# Altium PCB osc_evo.PcbDoc (part 3 of 5)
Units mm, origin at the board's own origin, x right, y up, seen from the top; angles counter-clockwise.
Board outline 145 x 85 mm, 4 copper layers (Top Layer, Mid-Layer 1, Mid-Layer 2, Bottom Layer); 114 components, 170 nets, 648 pads, 625 vias.
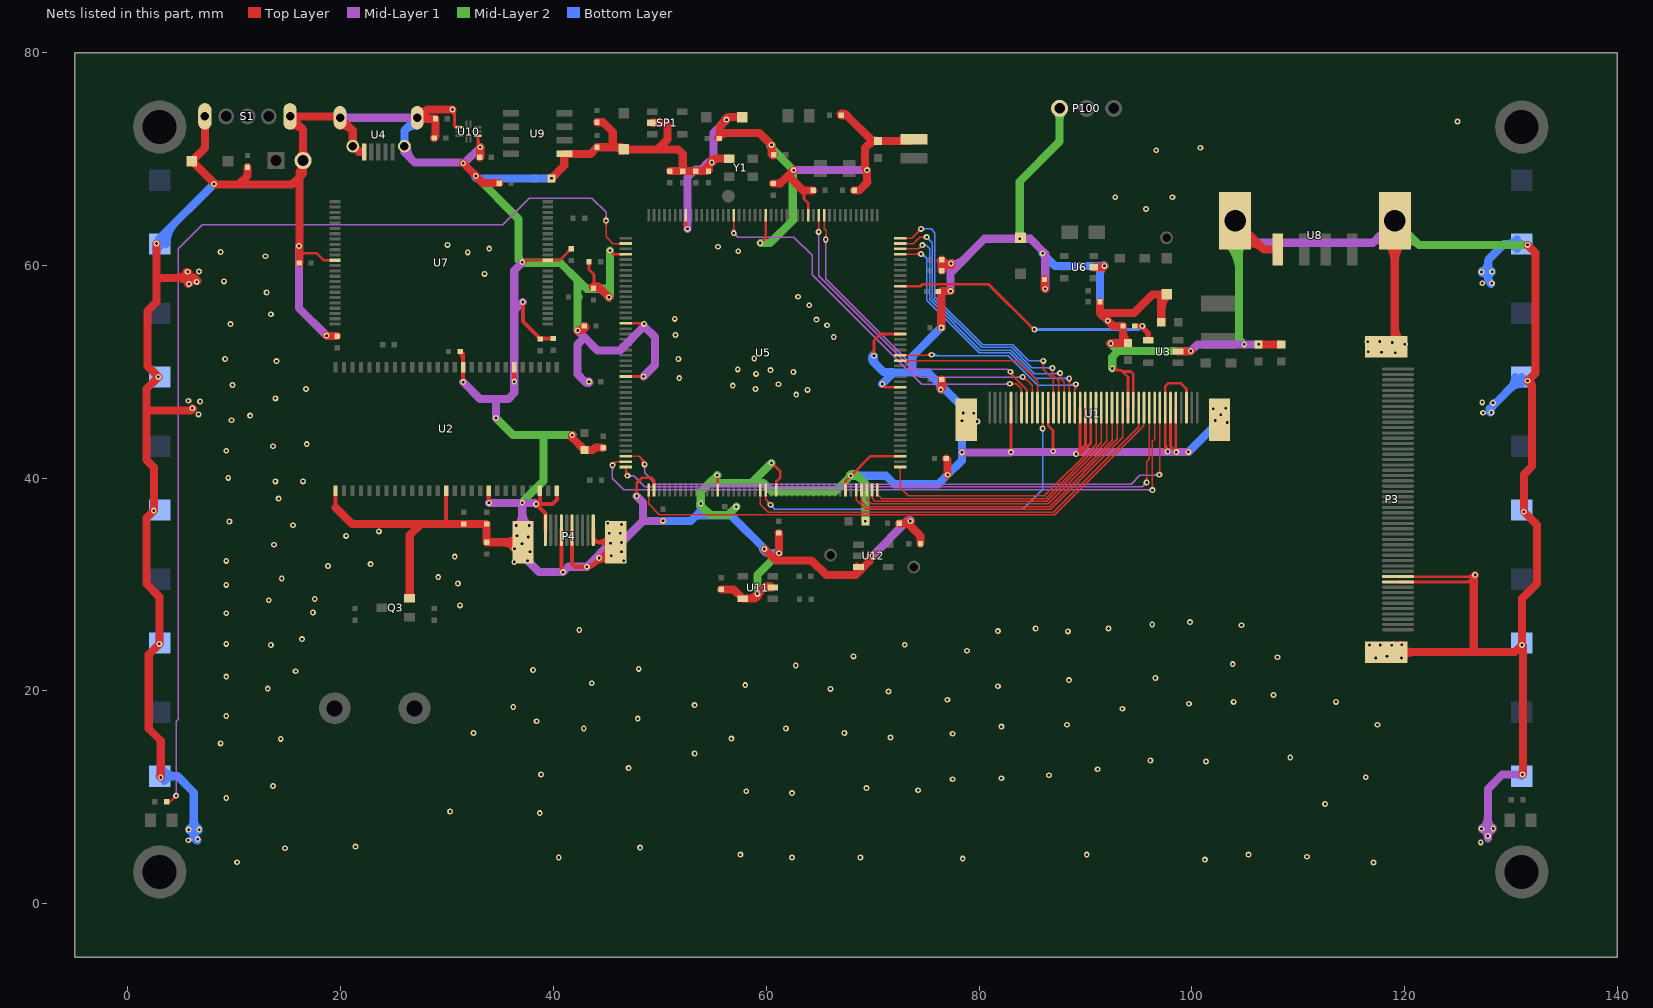
[diagram p5: the nets of this part, all layers, seen from the top]

## Via types
v1: diameter 0.55, hole 0.25, Top Layer to Bottom Layer, tented both sides, 463 vias
v2: diameter 0.55, hole 0.25, Top Layer to Bottom Layer, 156 vias
v3: diameter 0.45, hole 0.2, Top Layer to Bottom Layer, tented both sides, 4 vias
v4: diameter 1.5, hole 1.5, Top Layer to Bottom Layer, tented both sides, 2 vias

## Nets (pads, with @x,y where several pads share a name; then routed paths per layer and width w, separated by ;. In a path a pad name is that pad's centre, name@x,y a point inside that pad or via, vN(x,y) a via of type N, cw(c..) or ccw(c..) an arc to the next point about the centre after c; other vN are vias at no path point) (continued)
GND: BT1.2 C1.2 C2.2 C4.2 C5.2 C6.2 C7.2 C8.2 C9.2 C10.2 C11.2 C12.2 C14.2 C15.2 C16.2 C17.2 C18.2 C19.2 C20.2 C21.2 C22.2 C23.2 C24.2 C25.2 C26.2 C27.2 C28.2 C29.2 C30.2 C31.2 C32.2 C33.2 C34.2 C35.1 C36.1 C37.2 C38.2 C39.2 C40.2 C41.1 C42.1 C43.2 C44.2 C45.2 C46.1 C47.2 C48.2 C49.2 C50.2 C51.2 C52.2 C53.2 C54.2 K1.1 K2.1 K3.1 K4.1 K5.1 K6.1 K7.1 K8.1 K9.1 K10.1 P1.2 P3.0 P3.10 P3.11 P4.0 P4.1 P4.4 P4.6 P4.10 P100.1 Q3.2 R1.2 R2.1 R5.2 R7.2 R12.1 R13.1 R37.1 S1.1 S1.5 SP1.2 U1.0 U1.3 U1.5 U1.6 U1.7 U1.13 U1.14 U1.21 U1.22 U1.23 U1.29 U1.36 U2.6 U2.12 U2.28 U2.41 U2.46 U2.52 U2.54 U3.2 U4.0 U4.5 U5.14 U5.22 U5.37 U5.48 U5.61 U5.71 U5.90 U5.102 U5.113 U5.126 U5.135 U5.148 U5.158 U6.2 U7.13 U7.36 U8.0 U8.4 U9.1 U10.3 U10.8 U11.2 U11.5 U12.3 Y1.2 | length 1116
  Top Layer w0.254: 16.125,60.875 16.375,61.125 17.775,61.125 18.425,60.475 U7.36@19.475,60.475 ; v1@30.42,74.545 cw(c29.745,73.87) 30.7,73.87 ; v1(30.525,74.65) 30.7,74.475 30.7,73.1 30.775,73.025 U10.8@31.1,73.025 ; 30.7,73.393 ccw(c31.318,73.393) U10.8@30.881,72.956 ; 32.9,71.387 ccw(c33.412,71.387) v1@33.05,71.025 ; 32.9,72.001 ccw(c34.026,72.001) v1@33.23,71.205 ; U10.3@32.9,72.1 32.9,71.325 ; v1@32.978,71.113 ccw(c32.71,71.135) 32.9,71.325 ; v1@33.112,71.247 cw(c33.09,71.515) 32.9,71.325 ; v1(33.125,71.1) 32.9,71.325 ; v1(37.075,60.3) 37.25,60.475 U7.13@39.475,60.475 40.575,60.475 41.65,61.55 C45.2@41.675,61.55 ; v1@37.18,60.195 cw(c37.855,59.52) 37.855,60.475 ; 41.422,61.322 cw(c41.675,61.07) C45.2@41.675,61.427 ; C45.2@41.483,61.383 ccw(c41.315,61.55) C45.2@41.552,61.55 ; C30.2@43.263,60.238 cw(c43.053,60.028) 43.35,60.028 cw(c43.647,60.028) C30.2@43.437,60.238 ; C30.2@43.35,60.325 43.35,59.625 43.825,59.15 R12.1@43.825,57.9 ; R12.1@43.688,57.937 ccw(c43.357,58.268) 43.825,58.268 ; v1@45.327,61.255 cw(c45.327,60.971) 45.528,61.172 ; v1(45.327,61.403) 45.327,61.373 45.65,61.05 U5.48@46.8,61.05 ; v1@45.475,61.403 ccw(c45.905,61.403) 45.601,61.099 ; U5.71@46.8,49.55 v1(48.475,49.55) ; U5.61@46.8,54.55 48.475,54.55 v1(48.525,54.5) ; v1@47.72,38.43 ccw(c47.468,38.682) 47.825,38.682 ccw(c48.182,38.682) v1@47.93,38.43 ; v1(47.825,38.325) 47.825,39.525 48.35,40.05 49.2,40.05 49.45,39.8 U5.90@49.45,38.9 ; 48.047,54.55 cw(c48.047,54.022) v1@48.42,54.395 ; v1@48.37,49.445 ccw(c48.118,49.193) 48.118,49.55 ccw(c48.118,49.907) v1@48.37,49.655 ; U5.37@52.45,64.144 ccw(c53.319,64.144) v1@52.705,63.53 ; U5.37@52.45,64.7 52.45,63.625 v1@52.712,63.362 ; v1@55.295,40.17 cw(c54.922,39.797) 55.45,39.797 ; v1(55.4,40.275) 55.425,40.275 55.45,40.25 U5.102@55.45,38.9 ; v1(59.45,62.1) 59.475,62.1 59.95,62.575 U5.22@59.95,64.7 ; v1@59.45,62.248 ccw(c59.45,62.666) 59.745,62.37 ; v1@59.598,62.1 cw(c59.895,62.1) 59.685,62.31 ; v1@60.5,41.277 cw(c60.5,40.859) 60.795,41.155 ; v1(60.5,41.425) 60.525,41.425 61.325,40.625 61.325,40.075 60.95,39.7 U5.113@60.95,38.9 ; v1@60.648,41.425 ccw(c60.945,41.425) 60.735,41.215 ; 63.475,67.05 63.55,66.975 63.55,66.25 63.946,65.854 63.946,64.704 U5.14@63.95,64.7 ; U5.126@67.45,38.9 67.45,39.725 v1(67.95,40.225) 69.775,42.05 U5.135@72.6,42.05 ; v1@67.802,40.225 cw(c67.445,40.225) 67.697,39.972 cw(c67.95,39.72) v1@67.95,40.077 ; v1@67.95,40.373 ccw(c67.95,40.73) 68.203,40.478 ccw(c68.455,40.225) v1@68.098,40.225 ; v1@70.02,51.605 ccw(c69.768,51.857) 70.125,51.857 ccw(c70.482,51.857) v1@70.23,51.605 ; v1(70.125,51.5) 70.125,52.925 70.75,53.55 U5.158@72.6,53.55 ; v1@70.9,48.702 cw(c70.9,48.345) 71.153,48.597 cw(c71.405,48.85) v1@71.048,48.85 ; v1(70.9,48.85) 71.2,48.55 U5.148@72.6,48.55 ; v1@82.895,42.555 ccw(c82.643,42.807) 83,42.807 ccw(c83.357,42.807) v1@83.105,42.555 ; v1(83,42.45) U1.36@83,46.625 ; U1.29@86.5,46.625 86.5,44.95 86.95,44.5 86.95,42.55 v1(86.975,42.525) ; v1@86.87,42.63 ccw(c86.678,42.822) 86.95,42.822 ; 86.95,42.943 ccw(c87.393,42.943) v1@87.08,42.63 ; v1@89.125,42.169 ccw(c89.125,42.879) 89.627,42.377 ; v1@89.23,42.17 cw(c89.482,41.918) 89.482,42.275 cw(c89.482,42.632) v1@89.23,42.38 ; v1@89.273,42.275 cw(c89.63,42.275) 89.378,42.528 cw(c89.125,42.78) 89.125,42.423 ccw(c89.125,43.746) 90.06,42.81 ; U1.23@89.5,46.625 89.5,42.65 ; U1.22@90,46.625 90,43.15 89.5,42.65 ; U1.21@90.5,46.625 90.5,43.25 89.525,42.275 v1(89.125,42.275) 89.5,42.65 ; v1(92.525,50.3) 92.675,50.15 93.35,50.15 93.475,50.025 ; v1@92.63,50.405 ccw(c93.244,51.019) 93.244,50.15 ; U1.14@94,46.625 94,49.5 93.475,50.025 ; U1.13@94.5,46.625 94.5,49.775 94.25,50.025 93.475,50.025 ; 97.5,42.787 ccw(c98.012,42.787) v1@97.65,42.425 ; 97.5,43.4 ccw(c98.625,43.4) v1@97.83,42.605 ; v1@97.578,42.513 ccw(c97.311,42.535) 97.5,42.725 ccw(c97.69,42.914) v1@97.712,42.647 ; v1(97.725,42.5) 97.5,42.725 97.5,48.6 97.825,48.925 98.95,48.925 99.5,48.375 U1.3@99.5,46.625 ; U1.6@98,46.625 98,43 v1@98.492,42.508 ; v1@98.402,42.45 ccw(c98.045,42.45) 98.297,42.703 ccw(c98.55,42.955) v1@98.55,42.598 ; 98.492,42.947 ccw(c99.047,42.947) v1@98.655,42.555 ; U1.5@98.5,46.625 98.492,46.617 v1@98.492,42.508 ; v1(98.55,42.45) v1@98.492,42.508 ; P3.10@119.375,30.25 125.975,30.25 126.475,30.75 P3.11@119.375,30.75 ; 125.906,30.75 ccw(c125.906,31.619) v1@126.52,31.005 ; v1@126.477,30.9 cw(c126.12,30.9) 126.372,30.647 cw(c126.625,30.395) v1@126.625,30.752
  Top Layer w0.381: 19.525,37.25 U2.28@19.525,38.825 ; U2.41@29.925,38.825 29.925,35.75 29.975,35.7 ; C8.2@31.208,51.858 cw(c30.442,51.092) 31.525,51.092 ; C8.2@31.241,51.841 cw(c31.191,51.511) 31.525,51.511 ; C8.2@31.25,51.9 31.525,51.625 U2.12@31.525,50.425 31.525,48.975 31.5,48.95 31.5,49 v1(31.525,49.025) ; U2.46@33.925,38.825 33.925,37.7 v1(33.95,37.675) ; v1(36.325,49.075) U2.6@36.325,50.425 ; v1(37.125,56.55) 37.125,54.725 C4.2@38.775,53.075 38.825,53.125 C6.2@39.975,53.125 ; U2.52@38.725,38.825 38.725,37.925 v1(38.375,37.575) ; C4.2@38.817,53.033 cw(c39.039,52.811) 39.039,53.125 ; P4.1@39.25,35.11 39.25,36.7 v1(38.375,37.575) ; U2.54@40.325,38.825 40.325,37.975 39.925,37.575 v1(38.375,37.575) ; v1@40.75,31.375 P4.4@40.75,35.11 ; 40.75,31.741 ccw(c41.466,31.741) v1@40.96,31.235 ; P4.6@41.75,35.11 41.75,31.975 42.05,31.675 43.535,31.675 ; v1@43.15,31.759 ccw(c43.15,32.893) 43.952,32.091 ; 43.567,31.693 ccw(c42.891,32.895) v1@44.219,32.523 ; P4.10@43.75,35.11 43.75,34.35 44.11,33.99 ; 43.991,32.131 cw(c45.24,30.883) P4.0@45.731,32.578 ; 44.012,32.148 ccw(c43.677,32.575) v1@44.216,32.51 ; 44.113,32.253 ccw(c43.867,32.5) v1@44.216,32.5 ; v1@44.3,32.584 ccw(c44.3,32.933) 44.547,32.687 ; v1@44.351,32.567 ccw(c44.705,33.03) 44.782,32.452 ; v1@44.447,32.587 cw(c45.444,31.59) P4.0@45.837,32.944 ; P4.0@44.954,33.99 cw(c44.954,33.479) P4.0@45.315,33.84 ; P4.0@44.959,33.098 ccw(c44.157,33.9) P4.0@45.291,33.9 ; P4.0@45.128,32.537 ccw(c45.007,32.938) P4.0@45.376,32.74 ; P4.0@45.231,33.469 ccw(c44.11,32.525) 44.11,33.99 ; P4.0@45.231,34.511 cw(c44.11,35.455) 44.11,33.99 ; P4.0@45.375,33.99 44.11,33.99 ; P4.0@45.52,32.747 ccw(c45.87,32.977) P4.0@45.786,32.567 ; P4.0@45.568,33.707 43.535,31.675 ; P4.0@45.625,32.212 ccw(c45.035,30.175) 43.535,31.675 ; v1@44.361,32.558 ccw(c45.147,33.312) 45.124,32.223 cw(c45.147,33.312) v1@44.361,32.558
  Top Layer w0.762: v1(2.7,62.05) 2.7,58.825 ; v1(3.1,11.875) 3.1,15.325 1.975,16.45 1.975,23.425 v1(2.975,24.425) 2.975,28.85 1.75,30.075 1.75,36.25 v1(2.45,36.95) 2.45,41 1.75,41.7 1.75,46.375 ; 4.493,58.825 ccw(c4.493,60.532) v1@5.7,59.325 ; 4.618,58.825 cw(c4.618,57.118) v1@5.825,58.325 ; v1@5.527,59.36 ccw(c6.325,59.688) 6.325,58.825 ; v1@5.646,58.271 cw(c6.325,58.132) 6.325,58.825 ; 5.826,58.825 cw(c5.826,57.801) v1@6.55,58.525 ; 5.848,46.375 ccw(c5.848,46.802) v1@6.15,46.5 ; v1(6.075,46.575) 5.875,46.375 1.75,46.375 ; S1.1@7.25,74 7.25,71.025 C38.2@6.025,69.8 v1@8.137,67.687 ; v1@8.225,67.6 10.425,67.6 ; C39.2@11.25,69.225 11.25,68.425 10.425,67.6 ; S1.5@15.297,73.135 cw(c15.547,71.847) 16.475,72.775 ; C44.2@16.125,60.225 16.125,60.875 16.125,68.275 ; P1.2@16.158,69.577 cw(c15.669,69.156) 16.125,68.7 ; P1.2@16.179,69.554 cw(c15.463,68.838) 16.475,68.838 cw(c17.487,68.838) P1.2@16.771,69.554 ; P1.2@16.179,70.146 ccw(c15.463,70.862) 16.475,70.862 ccw(c17.487,70.862) P1.2@16.771,70.146 ; v1(18.675,53.4) 18.725,53.35 C7.2@19.675,53.35 ; 19.12,74 cw(c19.12,73.045) U4.0@19.795,73.72 ; 19.525,37.25 21.075,35.7 27.55,35.7 ; U4.0@19.954,73.156 cw(c19.988,71.513) 21.15,72.675 ; U4.0@21.366,71.232 ccw(c22.025,71.343) 22.025,70.675 21.67,70.675 U4.0@21.15,71.195 21.15,72.675 ; Q3.2@26.475,28.725 26.5,28.75 26.5,34.65 27.55,35.7 ; U4.0@27.319,74.559 ccw(c27.691,75.134) 28.175,74.65 ; U4.0@27.355,74.03 ccw(c27.97,74.645) 27.97,73.775 ; R13.1@28.8,71.975 28.925,72.1 C51.2@28.925,73.775 27.3,73.775 28.175,74.65 ; v1(30.525,74.65) 28.175,74.65 ; v1(31.525,69.6) 33.4,67.725 C47.2@34.925,67.725 ; C50.2@33.075,70.15 33.125,70.2 v1(33.125,71.1) ; 35.157,33.975 cw(c35.157,32.182) P4.0@36.425,33.45 ; 35.382,33.975 ccw(c35.382,35.768) P4.0@36.65,34.5 ; 35.619,33.975 ccw(c35.619,35.521) P4.0@36.712,34.428 ; 35.692,33.975 cw(c35.692,32.532) P4.0@36.712,33.552 ; 35.933,33.888 cw(c35.625,33.035) P4.0@36.446,33.42 ; P4.0@36.254,33.421 cw(c37.135,32.998) P4.0@37.135,33.975 ; P4.0@36.47,34.562 ccw(c37.135,34.645) P4.0@37.135,33.975 ; P4.0@36.484,34.296 ccw(c36.277,34.655) P4.0@36.677,34.548 ; P4.0@37.15,33.99 P4.0@37.135,33.975 ; v1(39.825,68.175) 41.025,69.375 U9.1@41.025,70.475 43.475,70.475 C48.2@44.1,71.1 45.575,71.1 ; v1(41.775,44.05) 41.775,43.8 C32.2@42.925,42.65 43.7,42.65 43.95,42.9 44.603,42.9 C40.2@44.653,42.85 ; C29.2@42.9,54.3 v1@42.475,53.875 ; C29.2@43.001,54.216 cw(c42.275,54.817) v1(42.275,53.875) v1@42.475,53.875 ; C29.2@43.023,54.254 cw(c42.475,54.46) v1@42.475,53.875 ; R12.1@43.701,57.958 cw(c43.978,57.553) 44.325,57.9 ; R12.1@43.775,57.981 cw(c43.775,56.849) 44.576,57.649 ; R12.1@43.825,57.9 44.325,57.9 ; C41.1@44.1,73.448 44.677,73.448 45.575,72.55 45.575,71.1 ; v1(45.225,57) 44.325,57.9 ; 45.826,71.1 cw(c45.826,70.124) C37.2@46.516,70.814 ; SP1.2@49.3,73.386 49.314,73.4 50.525,73.4 50.725,73.2 50.725,71.825 49.798,70.898 ; C15.2@50.95,68.85 C26.2@52.158,68.85 ; C11.2@54.444,68.85 cw(c55.335,68.85) v1@54.705,69.48 ; C11.2@54.618,68.974 ccw(c54.445,68.48) 54.075,68.85 ; v1@54.788,69.698 cw(c55.25,69.535) 55.25,70.025 ; v1@54.813,69.737 cw(c55.507,69.043) 55.507,70.025 ; C25.2@55.482,72.018 cw(c56.526,70.974) 56.526,72.45 ; C52.2@55.775,29.55 56.925,29.55 U11.5@57.8,28.675 58.725,28.675 ; v1@56.2,73.775 cw(c56.562,73.413) 56.562,73.925 ; Y1.2@56.525,70.025 55.25,70.025 ; C12.2@57.75,73.925 56.5,73.925 v1(56.275,73.7) 55.65,73.075 55.65,72.45 59.375,72.45 v1(60.5,71.325) 60.5,70.625 C42.1@60.725,70.4 ; 58.345,28.675 ccw(c58.345,29.955) v1@59.25,29.05 ; v1@59.277,29.097 cw(c58.725,29.247) 58.725,28.675 ; 59.471,29.421 cw(c60.4,28.493) U11.2@60.4,29.806 ; v1(59.825,33.35) 59.85,33.35 60.925,32.275 64.275,32.275 65.65,30.9 68.393,30.9 ; U11.2@60.445,29.793 ccw(c60.151,29.349) 59.775,29.725 ; C42.1@60.5,70.627 ccw(c60.952,70.627) C42.1@60.632,70.307 ; U11.2@60.6,29.725 59.775,29.725 ; C17.2@60.65,67.7 61.325,67.7 62.075,68.45 ; C16.2@61.175,34.85 61.2,34.825 v1(61.2,32.95) ; v1(62.575,68.95) 62.075,68.45 ; C36.1@64.425,67.05 63.475,67.05 62.075,68.45 ; R7.2@67.003,74.222 cw(c67.195,73.72) 67.575,74.1 ; R7.2@67.05,74.1 67.575,74.1 ; R7.2@67.05,74.231 cw(c67.05,73.28) 67.723,73.952 ; C35.1@68.275,67.05 68.75,67.05 69.525,67.825 69.475,67.875 v1(69.475,68.95) 69.3,69.125 69.3,71.025 69.975,71.7 ; U12.3@68.55,31.681 cw(c67.886,31.408) 68.393,30.9 ; U12.3@68.875,31.569 ccw(c68.875,32.021) 69.195,31.702 ; 69.604,71.329 cw(c70.5,70.433) C49.2@70.5,71.7 ; 69.604,72.071 ccw(c70.5,72.967) C49.2@70.5,71.7 ; 69.683,32.251 cw(c70.424,32.251) v1@69.9,32.775 ; 69.683,32.287 cw(c70.34,32.287) v1@69.905,32.779 ; v1(69.975,32.7) 69.683,32.408 69.683,32.19 68.393,30.9 ; 72.468,71.7 ccw(c72.468,72.53) BT1.2@73.055,71.943 ; C14.2@72.5,35.75 73.325,35.75 74.5,34.575 C54.2@74.5,33.85 ; 73.263,35.75 ccw(c73.263,36.262) v1@73.625,35.9 ; v1@73.444,35.975 ccw(c74.274,35.975) 73.687,35.388 ; BT1.2@73.889,71.859 73.73,71.7 C49.2@70.5,71.7 ; C22.2@76.382,60.468 ccw(c76.85,60.695) 76.85,60.175 ; v1(76.4,48.325) 76.5,48.425 C27.2@76.5,49.275 ; C22.2@76.407,60.432 ccw(c77.029,61.054) 77.029,60.175 ; v1(76.45,54.15) 76.45,57.575 v1(77.325,57.575) ; C18.2@76.5,59.5 C22.2@76.5,60.525 76.85,60.175 ; C22.2@76.66,60.365 ccw(c77.375,61.081) v1@77.375,60.069 ; C23.2@76.925,41.85 77.05,41.725 v1(77.05,40.325) ; v1(77.375,60.175) 76.85,60.175 ; v1@77.422,60.08 cw(c77.202,60.527) 76.85,60.175 ; C53.2@86.15,58.675 86.15,57.875 v1(86.225,57.8) ; U6.2@90.8,59.825 91.675,59.825 v1(91.8,59.95) ; R37.1@91.375,56.575 91.375,55.525 ; v1(92.375,52.65) 92.425,52.7 C34.2@94,52.7 ; 93.525,53.847 ccw(c95.147,53.847) C34.2@94,52.7 ; R1.2@97.125,54.65 97.125,56.75 C9.2@97.65,57.275 96.3,57.275 94.55,55.525 91.375,55.525 ; 97.125,55.72 cw(c99.205,55.72) C9.2@97.734,57.191 ; 97.125,56.533 cw(c97.756,56.533) C9.2@97.667,57.157 ; U3.2@98.7,51.9 99.85,51.9 v1(99.9,51.95) ; U8.0@104.075,64.2 106.775,61.5 ; U8.0@104.209,62.669 cw(c104.817,61.169) 105.962,62.313 ; U8.0@104.495,61.963 cw(c105.286,60.011) 106.775,61.5 ; v1(106.275,52.575) C1.2@108.4,52.575 ; U8.4@108.075,61.5 106.775,61.5 ; P3.0@118.255,52.35 119.075,53.17 U8.0@119.075,64.2 ; P3.0@118.275,23.35 cw(c118.999,22.626) P3.0@118.999,23.65 ; U8.0@118.284,62.209 cw(c116.373,60.298) 119.075,60.298 cw(c121.777,60.298) U8.0@119.866,62.209 ; P3.0@118.628,23.65 cw(c118.628,22.028) P3.0@119.775,23.175 ; P3.0@118.725,24.225 ccw(c120.113,25.613) P3.0@120.113,23.65 ; P3.0@118.817,52.788 ccw(c118.195,53.41) 119.075,53.41 ; P3.0@118.906,24.3 cw(c118.255,24.301) P3.0@118.255,23.65 126.5,23.65 ; 119.075,54.279 ccw(c121.184,54.279) P3.0@119.693,52.788 ; P3.0@119.623,24.323 ccw(c120.178,24.471) P3.0@119.89,23.974 ; P3.0@119.625,23.175 cw(c120.772,22.028) 120.772,23.65 ; P3.0@119.693,23.212 cw(c120.749,22.156) 120.749,23.65 cw(c120.749,25.144) P3.0@119.693,24.088 ; v1(126.625,30.9) 126.5,30.775 126.5,23.65 ; v1(131.075,12.15) 131.133,12.208 131.133,24.217 v1(131.025,24.325) ; v1(131.55,61.925) 132.3,61.175 132.3,49.9 v1(131.55,49.15) 131.975,48.725 131.975,41.125 131.2,40.35 v1(131.2,36.85) 132.45,35.6 132.45,30.1 131.025,28.675 v1(131.025,24.325) ; v1@131.609,49.238 cw(c131.143,48.549) 131.975,48.549 ; v1@131.625,49.225 cw(c130.78,48.38) 131.975,48.38 ; 1.75,46.375 1.75,48.4 v1(2.875,49.525) 1.85,50.55 1.85,55.725 2.7,56.575 2.7,58.825 ; 2.7,58.825 6.325,58.825 ; 10.425,67.6 15.45,67.6 16.125,68.275 ; 16.125,68.275 16.475,68.625 16.475,69.05 ; 16.125,68.275 16.125,68.7 ; 16.125,68.7 16.475,69.05 ; 16.475,69.05 P1.2@16.475,69.85 16.475,72.775 ; 16.475,72.775 S1.5@15.25,74 19.825,74 U4.0@19.95,73.875 21.15,72.675 ; 27.55,35.7 29.975,35.7 C2.2@31.575,35.7 C5.2@33.725,35.7 C46.1@33.725,33.975 P4.0@37.135,33.975 ; 45.575,71.1 46.398,71.1 C37.2@46.6,70.898 49.798,70.898 ; 49.798,70.898 51.727,70.898 52.158,70.467 C26.2@52.158,68.85 ; C26.2@52.158,68.85 C19.2@53.367,68.85 54.075,68.85 ; 54.075,68.85 v1(54.888,69.662) 55.25,70.025 ; 58.725,28.675 v1(59.175,29.125) 59.775,29.725 ; 67.575,74.1 69.975,71.7 ; 69.975,71.7 C49.2@70.5,71.7 ; 91.375,55.525 v1(92.1,54.8) 92.6,54.3 R2.1@93.525,54.3 93.525,53.175 C34.2@94,52.7 ; 126.5,23.65 130.35,23.65 v1(131.025,24.325) ; P3.0@118.9,52.675 ccw(c118.477,53.098) 119.075,53.098 cw(c118.477,53.098) P3.0@118.9,52.675
  Mid-Layer 1 w0.381: 36.975,32.7 v1@37.5,32.175 ; 37.175,32.5 ccw(c37.575,32.901) v1@37.575,32.334
  Mid-Layer 1 w0.762: v1(16.1,61.825) 16.1,55.975 v1(18.675,53.4) ; U4.0@19.95,73.875 U4.0@27.2,73.875 ; U4.0@26,71.195 26,70.625 26.975,69.65 v1@31.525,69.65 ; U4.0@26.219,71.195 ccw(c28.124,71.195) 26.777,69.848 ; v1(31.525,49.025) 33.1,47.45 34.575,47.45 ; v1@31.675,69.65 v1(33.125,71.1) ; v1(33.95,37.675) v1@37.075,37.675 ; v1(34.6,45.65) 34.6,47.425 34.575,47.45 ; v1@36.6,35.475 ccw(c35.453,36.622) 37.075,36.622 ; v1@36.6,35.625 cw(c35.453,34.478) 37.075,34.478 ; v1@36.65,34.5 ccw(c35.624,35.526) 37.075,35.526 ; v1@36.65,34.65 cw(c35.624,33.624) v1@37.075,33.624 ; 36.975,32.7 37.075,32.8 v1@37.075,37.675 ; v1@37.05,60.25 36.325,59.525 36.325,55.75 ; 37.075,33.343 cw(c38.782,33.343) v1@37.575,34.55 ; 37.075,34.237 cw(c39.038,34.237) v1@37.65,35.625 ; 37.075,35.607 ccw(c38.782,35.607) v1@37.575,34.4 ; 37.075,36.863 ccw(c39.038,36.863) v1@37.65,35.475 ; v1(37.125,56.55) 36.325,55.75 ; v1(37.575,32.25) 38.65,31.175 v1(40.9,31.175) 41.4,31.675 v1(43.15,31.675) v1(45.375,33.9) ; v1(38.375,37.575) 38.275,37.675 v1@37.075,37.675 ; v1(42.275,53.875) 42.282,53.875 42.916,53.241 ; 42.848,49.177 ccw(c43.35,49.679) v1@43.35,48.969 ; v1(43.35,49.075) 42.95,49.075 ; v1@43.385,48.975 cw(c43.247,49.372) 42.95,49.075 ; 43.926,32.451 cw(c44.3,32.077) v1@44.3,32.606 ; v1@44.194,32.5 cw(c44.723,32.5) 44.349,32.874 ; v1(46.4,33.95) 48.438,35.987 ; v1(47.825,38.325) 48.438,37.713 48.438,35.987 ; v1(48.475,49.55) 49.55,50.625 49.55,53.25 48.525,54.275 46.25,52 44.157,52 42.916,53.241 ; v1(50.3,35.987) 48.438,35.987 ; v1(52.6,63.425) 52.6,68.276 53.35,69.026 53.901,69.026 54.537,69.662 v1(54.888,69.662) 55.039,69.814 55.039,72.464 v1(56.275,73.7) ; 54.47,69.596 cw(c54.888,69.178) v1@54.888,69.769 ; v1(62.575,68.95) v1(69.475,68.95) ; v1(69.975,32.7) 73.25,35.975 v1(73.55,35.975) ; 73.219,35.944 cw(c73.55,35.613) v1@73.55,36.081 ; v1(77.325,57.575) 77.325,59.3 ; v1@77.375,60.069 ccw(c77.375,61.805) 78.602,60.577 ; v1(77.375,60.175) 77.325,60.125 77.325,59.3 ; v1@77.469,60.224 cw(c76.764,59.861) 77.325,59.3 ; v1(78.4,42.425) 83,42.436 86.975,42.445 89.125,42.45 97.725,42.47 98.55,42.472 v1(99.675,42.475) ; v1@86.05,61.2 cw(c85.627,60.777) 86.225,60.777 ; v1@86.087,61.238 84.825,62.5 v1(83.825,62.5) 80.525,62.5 77.325,59.3 ; v1(86.225,57.8) v1@86.225,61.1 ; v1(99.9,51.95) 100.525,52.575 v1(104.925,52.575) v1(106.275,52.575) ; U8.0@104.075,64.2 106.15,62.125 ; U8.0@104.312,62.733 cw(c104.926,62.043) 105.579,62.696 ; U8.0@104.819,62.164 cw(c105.464,61.439) 106.15,62.125 ; 117.571,62.696 cw(c118.224,62.043) U8.0@118.838,62.733 ; U8.0@118.331,62.164 ccw(c117.686,61.439) 117,62.125 ; U8.0@119.075,64.2 117,62.125 ; v1@127.282,7.139 cw(c126.647,6.147) v1@127.825,6.147 ; v1@127.3,6.975 ccw(c126.032,8.243) 127.825,8.243 ; v1@127.825,6.215 cw(c129.067,6.215) v1@128.256,7.155 ; v1(127.825,6.375) 127.825,10.8 129.175,12.15 v1(131.075,12.15) ; 127.825,8.026 ccw(c129.276,8.026) v1@128.25,7 ; 34.575,47.45 35.775,47.45 36.325,48 v1(36.325,49.075) 36.325,55.75 ; 42.916,53.241 42.25,52.575 42.25,49.775 42.95,49.075 ; 106.15,62.125 117,62.125
  Mid-Layer 2 w0.762: v1(32.7,68.4) 36.738,64.363 36.738,60.587 ; v1(34.6,45.65) 36.2,44.05 39.075,44.05 ; 36.738,60.859 ccw(c37.634,60.859) v1@37,60.225 ; v1@37.05,60.25 v1@37.075,60.25 ; v1@37.052,60.196 cw(c37.138,60.587) 36.738,60.587 ; v1(37.075,37.7) 37.075,37.75 39.075,39.75 39.075,44.05 ; v1(37.075,60.3) v1@37.075,60.25 ; v1(41.775,44.05) 39.075,44.05 ; v1(42.275,53.875) 42.275,58.625 ; v1(45.225,57) 45.327,57.102 45.327,57.8 ; v1(45.327,61.403) 45.327,57.8 ; v1(55.4,40.275) 54.663,39.538 ; v1(57.2,37.325) 57.2,37.318 56.424,36.542 54.751,36.542 53.85,37.443 v1(53.85,37.625) 53.85,38.725 54.663,39.538 ; v1(59.175,29.125) 59.175,30.925 v1(61.2,32.95) ; v1(59.45,62.1) 60.375,62.1 62.5,64.225 62.5,69.025 60.5,71.025 v1(60.5,71.325) ; v1@60.394,71.325 ccw(c60.862,71.325) 60.531,70.994 ; v1(60.5,41.425) 58.613,39.538 ; v1@67.898,40.317 cw(c68.176,39.826) 68.575,40.225 ; v1@67.95,40.331 cw(c67.95,39.078) 68.836,39.964 ; v1@69.325,36.175 69.325,39.475 68.575,40.225 ; v1(83.825,62.5) 83.825,67.875 87.575,71.625 P100.1@87.575,74.75 ; P100.1@87.279,74.454 cw(c86.563,73.738) 87.575,73.738 cw(c88.587,73.738) P100.1@87.871,74.454 ; v1(92.375,52.65) 93.075,51.95 ; v1(92.525,50.3) 92.525,51.4 93.075,51.95 ; v1(99.9,51.95) 93.075,51.95 ; U8.0@103.284,62.209 cw(c100.468,59.393) 104.45,59.393 ; U8.0@103.823,62.748 cw(c102.308,61.233) 104.45,61.233 ; U8.0@104.075,64.2 104.45,63.825 104.45,53.05 v1(104.925,52.575) ; 104.45,61.204 cw(c105.871,61.204) U8.0@104.866,62.209 ; U8.0@119.075,64.2 121.35,61.925 ; U8.0@119.277,62.706 cw(c119.91,61.782) 120.701,62.574 ; U8.0@119.708,62.077 cw(c120.437,61.012) 121.35,61.925 ; v1(131.55,61.925) 121.35,61.925 ; 36.738,60.587 v1@37.075,60.25 ; v1@37.075,60.25 40.65,60.25 42.275,58.625 ; 42.275,58.625 43.1,57.8 45.327,57.8 ; 54.663,39.538 58.613,39.538 ; 58.613,39.538 59.738,39.538 60.5,38.775 66.5,38.775 v1(67.95,40.225) 68.575,40.225
  Bottom Layer w0.762: K3.1@2.745,62.146 cw(c2.559,61.746) K3.1@3,61.746 ; K3.1@2.775,61.975 ccw(c2.232,62.518) K3.1@3,62.518 ; K2.1@3,12 4.675,12 6.2,10.475 6.2,6.4 ; K3.1@3,62 3,62.55 v1(8.1,67.65) ; K2.1@3.438,11.562 cw(c4.494,10.506) 4.494,12 cw(c4.494,13.494) K2.1@3.438,12.438 ; K3.1@3.619,62 cw(c6.441,62) 4.446,63.996 ; v1@5.789,7.059 cw(c5.156,6.229) 6.2,6.229 ; v1@5.8,6.9 ccw(c4.834,7.866) 6.2,7.866 ; 6.175,6.375 6.2,6.4 ; 6.2,6.196 cw(c7.239,6.196) v1@6.667,7.063 ; 6.2,6.724 ccw(c7.224,6.724) v1@6.5,6 ; 6.2,7.987 ccw(c7.737,7.987) v1@6.65,6.9 ; v1@6.555,5.971 cw(c6.637,6.4) 6.2,6.4 ; U4.0@26,71.195 26,72.675 ; U4.0@27.196,73.156 ccw(c27.162,71.513) 26,72.675 ; U4.0@27.2,73.875 26,72.675 ; v1@32.625,68.325 ccw(c32.987,68.687) 32.987,68.175 ; v1(32.7,68.4) 32.925,68.175 v1(39.825,68.175) ; v1(50.3,35.987) 52.913,35.987 53.425,36.5 ; v1(53.85,37.625) 53.85,36.925 53.425,36.5 ; v1@59.726,33.313 ccw(c60.25,33.51) 60.25,32.95 ; v1@59.75,33.275 ccw(c60.535,34.06) 60.535,32.95 ; v1(61.2,32.95) 60.25,32.95 ; v1(67.95,40.225) 71.275,40.225 72.075,39.425 76.15,39.425 v1(77.05,40.325) 78.4,41.675 v1(78.4,42.425) 78.4,46.725 ; v1@70.019,51.5 ccw(c71.272,51.5) 70.386,50.614 ; v1@70.033,51.552 ccw(c70.524,51.274) 70.125,50.875 ; v1(70.125,51.5) 70.125,50.875 ; v1(70.9,48.85) 71.975,49.925 ; 76.298,48.827 cw(c75.796,48.325) v1@76.506,48.325 ; v1@76.4,48.431 cw(c76.4,47.721) 76.902,48.223 ; v1(76.45,54.15) 76.425,54.15 73.725,51.45 73.725,49.925 ; 78.37,46.755 cw(c77.74,46.125) v1@78.631,46.125 ; v1@78.631,46.119 ccw(c77.84,46.165) 78.4,46.725 ; v1(85.975,61.125) 87.15,59.95 v1(91.8,59.95) 91.375,59.525 91.375,55.525 v1(92.1,54.8) ; 91.375,59.18 cw(c92.57,59.18) v1@91.725,60.025 ; 91.375,59.349 cw(c92.207,59.349) v1@91.741,60.038 ; v1(99.675,42.475) 102.725,45.525 ; 102.08,44.88 ccw(c101.536,45.425) v1@102.306,45.425 ; v1@102.195,45.319 ccw(c102.226,46.024) 102.725,45.525 ; v1@102.224,45.322 ccw(c102.081,45.95) v1(102.725,45.95) 102.725,45.525 ; 102.605,45.405 ccw(c102.061,45.95) v1@102.831,45.95 ; v1@102.824,45.988 cw(c102.417,45.833) 102.725,45.525 ; v1@127.266,59.473 cw(c126.879,58.555) 127.875,58.555 ; v1@127.294,59.294 ccw(c126.228,60.55) 127.875,60.55 ; 127.875,58.811 cw(c128.814,58.811) v1@128.15,59.475 ; 127.875,58.875 127.875,60.55 ; 127.875,59.989 ccw(c128.814,59.989) v1@128.15,59.325 ; 128,46.55 128.05,46.55 K5.1@131,49.5 ; v1@128.044,46.175 cw(c128.935,46.175) v1@128.305,46.805 ; 128.287,46.787 ccw(c127.998,47.075) v1@128.406,47.075 ; v1@128.3,46.969 ccw(c128.3,47.377) 128.588,47.088 ; K5.1@130.195,48.695 cw(c131.55,47.339) K5.1@131.55,49.256 ; K5.1@130.381,49.5 cw(c128.887,49.5) 129.943,48.443 cw(c131,47.387) K5.1@131,48.881 ; K6.1@130.562,61.562 ccw(c129.506,60.506) 129.506,62 ccw(c129.506,63.494) K6.1@130.562,62.438 ; K10.1@131,12 131,12.075 v1(131.075,12.15) ; K6.1@131,62 129.325,62 127.875,60.55 ; 53.425,36.5 56.7,36.5 60.25,32.95 ; 70.125,50.875 71.025,49.975 71.925,49.975 71.975,49.925 ; 71.975,49.925 73.725,49.925 ; 73.725,49.925 75.2,49.925 78.4,46.725 ; 127.875,58.854 ccw(c128.729,58.854) 128.125,58.25 cw(c128.729,58.854) 127.875,58.854
  other v1: 127.15,5.775 5.7,5.975 6.575,6.075 5.725,6.975 6.725,6.975 127.225,7.05 128.325,7.075 117.275,23.1 119.7,23.1 118.35,23.275 118.8,24.3 116.7,24.325 117.7,24.325 119.725,24.35 36.325,32.125 46.6,32.25 44.3,32.5 45.45,32.7 37.8,33.1 46.4,33.1 36.35,33.375 37.05,33.825 37.65,34.475 36.575,34.575 45.25,34.825 46.3,34.825 36.525,35.55 37.725,35.55 46.4,35.65 45.125,35.75 69.325,35.95 103.325,45.225 79.85,45.325 78.4,45.4 102.2,45.425 6.65,46 79.5,46.1 78.525,46.125 127.375,46.15 128.15,46.175 102,46.525 103.2,46.575 128.3,47.075 127.3,47.125 6.8,47.2 5.7,47.275 119.125,51.775 117.825,51.825 116.575,51.875 120.025,52.6 118.825,52.75 116.525,52.825 117.65,52.85 5.75,58.25 127.3,58.325 128.2,58.325 6.475,58.45 127.225,59.375 5.625,59.4 128.225,59.4 6.7,59.425
  other v2: 117.075,3.875 10.275,3.9 101.225,4.15 78.475,4.25 40.5,4.35 62.425,4.35 68.85,4.35 110.825,4.425 57.575,4.625 90.125,4.625 105.325,4.625 14.775,5.225 48.15,5.275 21.4,5.375 38.725,8.525 30.3,8.675 112.525,9.375 9.25,9.95 62.425,10.4 58.125,10.575 74.275,10.675 69.425,10.875 13.65,11.075 77.525,11.7 82.1,11.8 116.35,11.9 86.575,12.075 38.85,12.15 91.15,12.65 47.075,12.75 101.325,13.375 96.1,13.475 109.25,13.75 53.275,14.125 8.725,15.075 14.375,15.5 56.725,15.525 71.675,15.625 77.525,15.975 32.5,16.05 67.35,16.05 42.85,16.475 61.85,16.475 82.1,16.65 88.275,16.825 117.45,16.825 38.425,17.15 47.925,17.4 9.25,17.65 93.475,18.325 36.225,18.5 53.275,18.675 99.725,18.8 103.925,18.975 113.55,18.975 77.025,19.175 107.675,19.625 71.5,19.95 66.05,20.2 13.15,20.225 81.775,20.45 58.025,20.55 43.6,20.725 88.45,21.025 96.575,21.225 9.25,21.35 15.775,21.85 38.1,21.975 48.025,22.075 62.775,22.4 103.85,22.525 108.05,23.175 68.2,23.25 78.875,23.775 13.45,24.325 73.025,24.35 9.25,24.425 16.375,24.875 88.35,25.6 81.775,25.625 42.425,25.725 85.325,25.875 92.175,25.875 104.675,26.175 96.275,26.25 99.825,26.475 9.25,27.3 17.4,27.375 31.225,28.05 13.25,28.525 17.575,28.65 9.25,29.975 31.025,30.1 14.475,30.575 29.175,30.7 18.825,31.75 22.825,31.925 9.25,32.225 30.725,32.625 13.75,33.75 20.525,34.575 23.6,35 15.525,35.575 9.55,35.925 14.175,38.075 13.875,39.7 16.475,39.7 9.45,40.025 9.25,42.575 13.65,43 16.825,43.2 9.75,45.45 11.5,45.875 13.875,47.5 62.825,47.85 63.875,48.3 16.75,48.375 59,48.375 56.85,48.7 9.85,48.75 61.15,48.825 51.825,49.4 59.05,49.8 62.55,49.975 60.4,50.15 57.325,50.225 13.975,51 9.15,51.2 51.75,51.2 58.875,51.25 66.35,53.275 51.475,53.45 65.725,54.375 9.65,54.475 64.725,54.9 51.4,54.975 13.45,55.4 64.05,56.25 63,57.05 13.05,57.45 9.05,58.5 33.525,59.2 12.95,60.85 31.95,61.225 8.725,61.25 57.375,61.325 33.975,61.575 55.475,61.75 30.05,61.925 95.7,65.3 92.8,66.4 98.175,66.4 96.65,70.825 100.8,71.05 124.975,73.525
LCD-B3: U1.24 U5.154 | length 25
  Top Layer w0.127: U5.154@72.6,51.55 75.5,51.55 v1(75.55,51.6) ; U5.154@73.118,51.507 cw(c73.223,51.402) 73.223,51.55 cw(c73.223,51.698) U5.154@73.118,51.594 ; 74.919,51.55 ccw(c74.919,52.231) v1@75.4,51.75 ; 75.16,51.55 cw(c75.16,51.21) v1@75.4,51.45 ; 75.225,51.55 ccw(c75.225,51.925) v1@75.49,51.66 ; v1@88.95,48.675 cw(c88.831,48.556) 89,48.556 ; U1.24@88.957,48.043 ccw(c88.852,48.148) 89,48.148 ccw(c89.148,48.148) U1.24@89.043,48.043 ; U1.24@89,46.625 v1@89,48.725 ; U1.24@89,48.073 cw(c89.852,48.073) v1@89.25,48.675 ; 89,48.38 cw(c89.545,48.38) v1@89.16,48.765
  Bottom Layer w0.127: v1(75.55,51.6) 75.629,51.521 82.761,51.521 85.532,48.75 v1@89.15,48.75 ; v1@75.61,51.66 ccw(c75.945,51.995) 75.945,51.521 ; v1@75.7,51.45 cw(c75.87,51.28) 75.87,51.521 ; v1@75.7,51.75 ccw(c76.251,52.301) 76.251,51.521 ; 88.408,48.75 ccw(c88.408,49.517) v1@88.95,48.975 ; 88.715,48.75 ccw(c88.715,49.21) v1@89.04,48.885 ; 88.77,48.75 cw(c88.77,48.495) v1@88.95,48.675
  other v1: 89.1,48.825
LCD-B4: U1.25 U5.173 | length 29.8
  Top Layer w0.127: U5.173@72.6,61.05 v1@74.575,61.05 ; U5.173@73.118,61.007 cw(c73.223,60.902) 73.223,61.05 cw(c73.223,61.198) U5.173@73.118,61.093 ; 73.979,61.05 ccw(c73.979,61.646) v1@74.4,61.225 ; 74.1,61.05 cw(c74.1,60.625) v1@74.4,60.925 ; v1@88.325,49.225 cw(c87.904,48.804) 88.5,48.804 ; U1.25@88.457,48.043 ccw(c88.352,48.148) 88.5,48.148 ccw(c88.648,48.148) U1.25@88.543,48.043 ; v1(88.475,49.375) 88.5,49.35 U1.25@88.5,46.625 ; 88.5,48.925 cw(c88.925,48.925) v1@88.625,49.225
  Bottom Layer w0.127: v1@74.558,60.991 cw(c74.601,60.556) 74.91,60.865 ; v1@74.571,60.865 cw(c74.635,60.21) 75.1,60.675 ; v1@74.575,61.075 74.7,61.075 75.1,60.675 ; v1@74.761,61.075 ccw(c74.91,61.075) 74.805,60.97 ; v1@88.325,49.225 ccw(c87.964,48.864) 87.964,49.375 ccw(c87.964,49.886) v1@88.325,49.525 ; v1(88.475,49.375) 85.266,49.375 82.866,51.775 80.025,51.775 75.1,56.7 75.1,60.675
  other v1: 74.55,61.075
LCD-B5: U1.26 U5.174 | length 29.9
  Top Layer w0.127: U5.174@72.6,61.55 74.3,61.55 ; U5.174@73.118,61.507 cw(c73.223,61.402) 73.223,61.55 cw(c73.223,61.698) U5.174@73.118,61.593 ; 74.332,61.582 ccw(c74.013,61.9) v1@74.464,61.9 ; v1@74.663,61.689 ccw(c74.637,61.213) 74.3,61.55 ; v1(74.675,61.9) 74.725,61.95 74.725,61.975 74.3,61.55 ; v1@87.478,49.723 cw(c87.14,49.375) 87.625,49.375 ; v1@87.625,49.775 87.625,49.375 ; v1@87.772,49.723 ccw(c88.11,49.375) 87.625,49.375 ; U1.26@87.957,48.043 ccw(c87.852,48.148) 88,48.148 ccw(c88.148,48.148) U1.26@88.043,48.043 ; U1.26@88,46.625 88,49 87.625,49.375
  Bottom Layer w0.127: v1(74.675,61.9) 75.025,61.9 ; v1@74.862,61.802 cw(c75.025,61.716) 75.025,61.9 ; v1@74.862,61.998 ccw(c75.025,62.084) 75.025,61.9 ; 86.994,49.825 ccw(c86.994,50.506) v1@87.475,50.025 ; 87.235,49.825 cw(c87.235,49.485) v1@87.475,49.725 ; 87.3,49.825 ccw(c87.3,50.2) v1@87.565,49.935 ; v1@87.55,49.825 85.175,49.825 82.971,52.029 80.13,52.029 75.354,56.805 75.354,61.571 75.025,61.9
  other v1: 87.625,49.875
LCD-B6: U1.27 U5.175 | length 30.5
  Top Layer w0.127: U5.175@72.6,62.05 73.825,62.05 74.425,62.65 v1(75.075,62.65) ; U5.175@73.118,62.007 cw(c73.223,61.902) 73.223,62.05 cw(c73.223,62.198) U5.175@73.118,62.093 ; v1@74.925,62.5 ccw(c74.564,62.139) 74.564,62.65 ccw(c74.564,63.161) v1@74.925,62.8 ; v1@86.75,50.2 cw(c86.389,49.839) 86.9,49.839 cw(c87.411,49.839) v1@87.05,50.2 ; v1(86.9,50.35) 86.9,49.734 87.475,49.159 87.475,46.65 U1.27@87.5,46.625 ; 87.475,48.209 ccw(c87.709,48.209) U1.27@87.543,48.043
  Bottom Layer w0.127: v1@75.075,62.439 cw(c75.075,61.928) 75.436,62.289 cw(c75.797,62.65) v1@75.286,62.65 ; v1(75.075,62.65) 75.608,62.117 75.608,56.91 80.235,52.283 83.076,52.283 84.98,50.38 86.87,50.38 v1(86.9,50.35) ; 86.318,50.38 cw(c86.318,49.768) v1@86.75,50.2 ; 86.461,50.38 ccw(c86.461,50.789) v1@86.75,50.5 ; 86.625,50.38 cw(c86.625,50.075) v1@86.84,50.29
LCD-B7: U1.28 U5.176 | length 31
  Top Layer w0.127: U5.176@72.6,62.55 73.675,62.55 v1(74.55,63.425) ; U5.176@73.118,62.507 cw(c73.223,62.402) 73.223,62.55 cw(c73.223,62.698) U5.176@73.118,62.593 ; v1@74.339,63.425 cw(c73.828,63.425) 74.189,63.064 cw(c74.55,62.703) v1@74.55,63.214 ; v1@85.9,50.875 cw(c85.539,50.514) 86.05,50.514 cw(c86.561,50.514) v1@86.2,50.875 ; v1(86.05,51.025) 86.05,50.225 87,49.275 U1.28@87,46.625 ; U1.28@86.957,48.043 ccw(c86.852,48.148) 87,48.148 ccw(c87.148,48.148) U1.28@87.043,48.043
  Bottom Layer w0.127: v1(74.55,63.425) 75.5,63.425 75.862,63.063 75.862,57.016 80.341,52.537 83.181,52.537 84.693,51.025 v1(86.05,51.025) ; v1@74.7,63.275 cw(c75.061,62.914) 75.061,63.425 cw(c75.061,63.936) v1@74.7,63.575 ; v1@85.9,50.875 ccw(c85.539,50.514) 85.539,51.025 ccw(c85.539,51.536) v1@85.9,51.175
LCD-BL: R2.2 U3.4 U5.167 | length 28.6
  Top Layer w0.254: U5.167@72.6,58.05 74.525,58.05 74.7,58.225 80.9,58.225 85.15,53.975 v1(85.2,53.975) ; 84.862,54.263 ccw(c85.2,54.601) v1@85.2,54.123
  Top Layer w0.508: R2.2@94.625,54.3 v1@95.225,54.3 ; v1@95.288,54.238 95.9,53.625 U3.4@95.9,52.95 ; v1@95.371,54.3 ccw(c95.723,54.3) 95.474,54.051
  Bottom Layer w0.254: v1(85.2,53.975) 95.025,53.975 v1(95.35,54.3) ; v1@85.305,53.87 cw(c85.557,53.618) 85.557,53.975 cw(c85.557,54.332) v1@85.305,54.08 ; v1@95.202,54.3 cw(c94.845,54.3) 95.097,54.047 cw(c95.35,53.795) v1@95.35,54.152
LCD-DEN: U1.34 U5.28 | length 41.2
  Top Layer w0.127: v1@56.8,63.175 ccw(c56.439,63.536) 56.95,63.536 ccw(c57.461,63.536) v1@57.1,63.175 ; U5.28@56.907,64.182 cw(c56.802,64.077) 56.95,64.077 cw(c57.098,64.077) U5.28@56.994,64.182 ; v1(56.95,63.025) U5.28@56.95,64.7 ; v1(82.9,48.875) 83.5,48.875 83.975,48.4 83.975,46.65 U1.34@84,46.625 ; v1@83.05,48.725 cw(c83.411,48.364) 83.411,48.875 cw(c83.411,49.386) v1@83.05,49.025 ; 83.975,48.209 ccw(c84.209,48.209) U1.34@84.043,48.043
  Mid-Layer 1 w0.127: v1@56.95,62.814 cw(c56.95,62.303) 57.311,62.664 cw(c57.672,63.025) v1@57.161,63.025 ; v1(56.95,63.025) 57.325,62.65 62.6,62.65 64.313,60.938 64.313,59.137 74.6,48.85 82.875,48.85 v1(82.9,48.875) ; 82.329,48.85 ccw(c82.329,49.446) v1@82.75,49.025 ; 82.45,48.85 cw(c82.45,48.425) v1@82.75,48.725
LCD-G2: U1.15 U5.128 | length 32.4
  Top Layer w0.127: U5.128@68.407,38.382 cw(c68.302,38.277) 68.45,38.277 cw(c68.598,38.277) U5.128@68.493,38.382 ; U5.128@68.45,38.9 68.45,37.966 69.349,37.067 86.735,37.067 93.5,43.832 U1.15@93.5,46.625 ; U1.15@93.457,45.207 cw(c93.352,45.102) 93.5,45.102 cw(c93.648,45.102) U1.15@93.543,45.207
LCD-G3: U1.16 U5.129 | length 31.4
  Top Layer w0.127: U5.129@68.907,38.382 cw(c68.802,38.277) 68.95,38.277 cw(c69.098,38.277) U5.129@68.993,38.382 ; U5.129@68.95,38.9 68.95,37.825 69.454,37.321 86.63,37.321 93,43.691 U1.16@93,46.625 ; U1.16@92.957,45.207 cw(c92.852,45.102) 93,45.102 cw(c93.148,45.102) U1.16@93.043,45.207
LCD-G4: U1.17 U5.130 | length 30.1
  Top Layer w0.127: U5.130@69.407,38.382 cw(c69.302,38.277) 69.45,38.277 cw(c69.598,38.277) U5.130@69.493,38.382 ; U5.130@69.45,38.9 69.45,38.016 69.891,37.575 86.525,37.575 92.5,43.55 U1.17@92.5,46.625 ; U1.17@92.457,45.207 cw(c92.352,45.102) 92.5,45.102 cw(c92.648,45.102) U1.17@92.543,45.207
LCD-G5: U1.18 U5.131 | length 28.9
  Top Layer w0.127: U5.131@69.907,38.382 cw(c69.802,38.277) 69.95,38.277 cw(c70.098,38.277) U5.131@69.993,38.382 ; U5.131@69.95,38.9 69.95,38.1 70.221,37.829 86.363,37.829 92,43.466 U1.18@92,46.625 ; U1.18@91.957,45.207 cw(c91.852,45.102) 92,45.102 cw(c92.148,45.102) U1.18@92.043,45.207
LCD-G6: U1.19 U5.132 | length 27.6
  Top Layer w0.127: U5.132@70.45,38.364 cw(c70.45,38.094) 70.64,38.285 ; U5.132@70.45,38.9 70.45,38.475 70.842,38.083 86.258,38.083 91.5,43.325 U1.19@91.5,46.625 ; U1.19@91.457,45.207 cw(c91.352,45.102) 91.5,45.102 cw(c91.648,45.102) U1.19@91.543,45.207
LCD-G7: U1.20 U5.133 | length 26.6
  Top Layer w0.127: U5.133@72.557,41.007 cw(c72.452,40.902) 72.6,40.902 cw(c72.748,40.902) U5.133@72.643,41.007 ; U5.133@72.6,41.05 72.6,39.1 73.363,38.337 86.153,38.337 91,43.184 U1.20@91,46.625 ; U1.20@90.957,45.207 cw(c90.852,45.102) 91,45.102 cw(c91.148,45.102) U1.20@91.043,45.207
LCD-HSYNC: U1.32 U5.12 | length 36.2
  Top Layer w0.127: v1@64.775,63.3 ccw(c64.354,63.721) 64.95,63.721 ; U5.12@64.907,64.182 cw(c64.802,64.077) 64.95,64.077 cw(c65.098,64.077) U5.12@64.993,64.182 ; v1(64.925,63.15) 64.95,63.175 U5.12@64.95,64.7 ; 64.95,63.6 ccw(c65.375,63.6) v1@65.075,63.3 ; v1@84.104,49.291 cw(c84.104,48.494) 84.667,49.058 ; v1@84.104,49.418 cw(c84.104,48.928) 84.451,49.274 ; v1(84.104,49.502) 84.082,49.525 84.2,49.525 85,48.725 U1.32@85,46.625 ; v1@84.316,49.502 ccw(c84.54,49.502) 84.381,49.344 ; U1.32@84.957,48.043 ccw(c84.852,48.148) 85,48.148 ccw(c85.148,48.148) U1.32@85.043,48.043
  Mid-Layer 1 w0.127: v1@64.775,63 cw(c64.414,62.639) 64.925,62.639 cw(c65.436,62.639) v1@65.075,63 ; v1(64.925,63.15) 64.925,59.045 74.467,49.502 v1(84.104,49.502) ; v1@83.955,49.353 ccw(c83.594,48.992) 83.594,49.502 ccw(c83.594,50.013) v1@83.955,49.652
LCD-ONOFF: U1.31 U5.153 | length 16.6
  Top Layer w0.127: U5.153@72.6,51.05 83.55,51.05 85.5,49.1 U1.31@85.5,46.625 ; U5.153@73.118,51.007 cw(c73.223,50.902) 73.223,51.05 cw(c73.223,51.198) U5.153@73.118,51.094 ; U1.31@85.457,48.043 ccw(c85.352,48.148) 85.5,48.148 ccw(c85.648,48.148) U1.31@85.543,48.043
LCD-PCLK: U1.30 U5.111 | length 39.7
  Top Layer w0.127: U5.111@59.907,38.382 cw(c59.802,38.277) 59.95,38.277 cw(c60.098,38.277) U5.111@59.994,38.382 ; U5.111@59.95,38.9 59.95,38 60.4,37.55 v1(60.4,37.5) ; 60.004,37.946 cw(c59.557,37.5) v1@60.189,37.5 ; 60.124,37.826 ccw(c60.4,38.101) v1@60.4,37.711 ; 60.22,37.73 cw(c59.991,37.5) v1@60.316,37.5 ; v1@85.825,44.825 ccw(c85.404,45.246) U1.30@86,45.246 ; U1.30@85.957,45.207 cw(c85.852,45.102) 86,45.102 cw(c86.148,45.102) U1.30@86.043,45.207 ; v1@86,44.7 U1.30@86,46.625 ; U1.30@86,45.125 ccw(c86.425,45.125) v1@86.125,44.825
  Bottom Layer w0.127: v1@60.4,37.289 cw(c60.4,36.778) 60.761,37.139 cw(c61.122,37.5) v1@60.611,37.5 ; v1(60.4,37.5) 60.825,37.075 84.1,37.075 85.975,38.95 v1(85.975,44.675) v1@86,44.7 ; v1@85.825,44.525 cw(c85.464,44.164) 85.975,44.164 cw(c86.486,44.164) v1@86.125,44.525
LCD-R3: U1.8 U5.86 | length 63.6
  Top Layer w0.127: U5.86@46.8,42.05 48.075,42.05 ; U5.86@47.319,42.007 cw(c47.424,41.902) 47.424,42.05 cw(c47.424,42.199) U5.86@47.319,42.094 ; 48.279,41.846 cw(c47.768,41.334) v1@48.491,41.304 ; v1@48.364,41.309 ccw(c47.376,41.351) 48.075,42.05 ; 48.484,41.641 cw(c48.16,41.318) v1@48.617,41.298 ; v1@48.6,41.525 48.075,42.05 ; v1@96.8,40.475 ccw(c96.319,40.956) 97,40.956 ; v1@96.89,40.385 ccw(c96.625,40.65) 97,40.65 ; v1(96.95,40.325) 97,40.375 U1.8@97,46.625 ; U1.8@96.957,45.207 cw(c96.852,45.102) 97,45.102 cw(c97.148,45.102) U1.8@97.043,45.207 ; 97,40.715 ccw(c97.34,40.715) v1@97.1,40.475
  Mid-Layer 1 w0.127: v1@48.425,41.15 cw(c48.064,40.789) 48.575,40.789 cw(c49.086,40.789) v1@48.725,41.15 ; v1(48.575,41.3) 48.575,40.5 49.625,39.45 94.3,39.45 95.125,40.275 96.9,40.275 v1(96.95,40.325) ; 96.319,40.275 ccw(c96.319,40.956) v1@96.8,40.475 ; 96.56,40.275 cw(c96.56,39.935) v1@96.8,40.175 ; 96.625,40.275 ccw(c96.625,40.65) v1@96.89,40.385
LCD-R4: U1.9 U5.87 | length 65.2
  Top Layer w0.127: v1(45.55,41.225) 45.875,41.55 U5.87@46.8,41.55 ; v1@45.566,41.436 ccw(c45.597,41.828) 45.875,41.55 ccw(c46.153,41.272) v1@45.761,41.241 ; U5.87@46.282,41.507 ccw(c46.177,41.402) 46.177,41.55 ccw(c46.177,41.699) U5.87@46.282,41.594 ; v1@96.15,39.025 ccw(c95.789,39.386) 96.3,39.386 ccw(c96.811,39.386) v1@96.45,39.025 ; v1(96.3,38.875) 96.3,43.475 96.5,43.675 U1.9@96.5,46.625 ; U1.9@96.457,45.207 cw(c96.352,45.102) 96.5,45.102 cw(c96.648,45.102) U1.9@96.543,45.207
  Mid-Layer 1 w0.127: v1@45.4,41.075 cw(c45.039,40.714) 45.55,40.714 cw(c46.061,40.714) v1@45.7,41.075 ; v1(45.55,41.225) 45.55,39.975 46.625,38.9 96.275,38.9 v1(96.3,38.875) ; 95.729,38.9 cw(c95.729,38.304) v1@96.15,38.725 ; 95.85,38.9 ccw(c95.85,39.325) v1@96.15,39.025
LCD-R5: U1.10 U5.88 | length 61.9
  Top Layer w0.127: U5.88@46.757,41.007 cw(c46.652,40.902) 46.8,40.902 cw(c46.949,40.902) U5.88@46.844,41.007 ; 46.8,40.47 ccw(c47.176,40.47) v1@46.921,40.194 ; 46.8,40.76 ccw(c47.443,40.76) v1@47.007,40.287 ; v1(46.95,40.225) 46.95,40.25 46.8,40.4 U5.88@46.8,41.05 ccw(c47.711,41.05) v1@47.093,40.38 ; v1@95.6,39.75 ccw(c95.239,40.111) 95.75,40.111 ccw(c96.261,40.111) v1@95.9,39.75 ; v1(95.75,39.6) 95.75,41.525 96,41.775 U1.10@96,46.625 ; U1.10@95.957,45.207 cw(c95.852,45.102) 96,45.102 cw(c96.148,45.102) U1.10@96.043,45.207
  Mid-Layer 1 w0.127: v1(46.95,40.225) 47.575,40.225 48.604,39.196 95.346,39.196 v1(95.75,39.6) ; v1@47.1,40.075 cw(c47.461,39.714) 47.461,40.225 cw(c47.461,40.736) v1@47.1,40.375 ; v1@95.539,39.6 cw(c95.028,39.6) 95.389,39.239 cw(c95.75,38.878) v1@95.75,39.389
LCD-R6: U1.11 U5.89 | length 53.9
  Top Layer w0.127: U5.89@48.907,38.382 cw(c48.802,38.277) 48.95,38.277 cw(c49.099,38.277) U5.89@48.994,38.382 ; U5.89@48.95,38.9 48.95,37.575 49.966,36.559 87.134,36.559 95.5,44.925 U1.11@95.5,46.625 ; U1.11@95.457,45.207 cw(c95.352,45.102) 95.5,45.102 cw(c95.648,45.102) U1.11@95.543,45.207
LCD-R7: U1.12 U5.110 | length 42.8
  Top Layer w0.127: U5.110@59.407,38.382 cw(c59.302,38.277) 59.45,38.277 cw(c59.598,38.277) U5.110@59.494,38.382 ; U5.110@59.45,38.9 59.45,37.55 60.187,36.813 86.988,36.813 95,44.825 U1.12@95,46.625 ; U1.12@94.957,45.207 cw(c94.852,45.102) 95,45.102 cw(c95.148,45.102) U1.12@95.043,45.207
LCD-VSYNC: U1.33 U5.11 | length 34.5
  Top Layer w0.127: U5.11@65.407,64.182 cw(c65.302,64.077) 65.45,64.077 cw(c65.598,64.077) U5.11@65.493,64.182 ; v1@65.45,62.575 ccw(c65.029,62.996) 65.625,62.996 ; U5.11@65.45,64.7 65.45,63.425 65.625,63.25 65.625,62.45 v1(65.6,62.425) ; 65.625,62.875 ccw(c66.05,62.875) v1@65.75,62.575 ; v1@82.95,49.789 cw(c82.95,49.64) 83.055,49.745 ; v1(82.95,50) 82.825,50 82.825,49.975 84.5,48.3 U1.33@84.5,46.625 ; v1@83.034,50 ccw(c83.601,50) 83.2,49.6 ; v1@83.161,50 ccw(c84.034,50) 83.417,49.383 ; U1.33@84.457,48.043 ccw(c84.352,48.148) 84.5,48.148 ccw(c84.648,48.148) U1.33@84.543,48.043
  Mid-Layer 1 w0.127: v1@65.45,62.275 cw(c65.089,61.914) 65.6,61.914 cw(c66.111,61.914) v1@65.75,62.275 ; v1(65.6,62.425) 65.6,58.729 74.079,50.25 82.7,50.25 v1(82.95,50)
LED0: R4.2 U5.46 | length 103.7
  Top Layer w0.127: R4.2@3.65,9.6 4,9.6 ; R4.2@3.805,9.496 cw(c4,9.365) 4,9.6 ; R4.2@3.805,9.704 ccw(c4,9.835) 4,9.6 ; v1@4.339,10.15 cw(c3.828,10.15) 4.189,9.789 cw(c4.55,9.428) v1@4.55,9.939 ; v1(4.55,10.15) 4,9.6 ; v1@44.8,64.05 cw(c44.439,63.689) 44.95,63.689 cw(c45.461,63.689) v1@45.1,64.05 ; v1(44.95,64.2) 44.95,62.675 45.575,62.05 U5.46@46.8,62.05 ; U5.46@46.282,62.007 ccw(c46.177,61.902) 46.177,62.05 ccw(c46.177,62.198) U5.46@46.282,62.093
  Mid-Layer 1 w0.127: v1@4.4,10.3 ccw(c4.039,10.661) 4.55,10.661 ccw(c5.061,10.661) v1@4.7,10.3 ; v1(4.55,10.15) 4.55,17.175 4.725,17.35 4.725,61.553 7.002,63.83 35.239,63.83 37.709,66.3 43.625,66.3 44.95,64.975 v1(44.95,64.2) ; v1@44.8,64.35 ccw(c44.439,64.711) 44.95,64.711 ccw(c45.461,64.711) v1@45.1,64.35